# Altium PCB BLDC Gate Driver Breakout.PcbDoc
Units mil, origin at the board's own origin, x right, y up, seen from the top; angles counter-clockwise.
Board outline 6000 x 4000 mil, 2 copper layers (Top Layer, Bottom Layer); 90 components, 53 nets, 246 pads, 0 vias.
Unrouted connection lines stored in the file: 165.
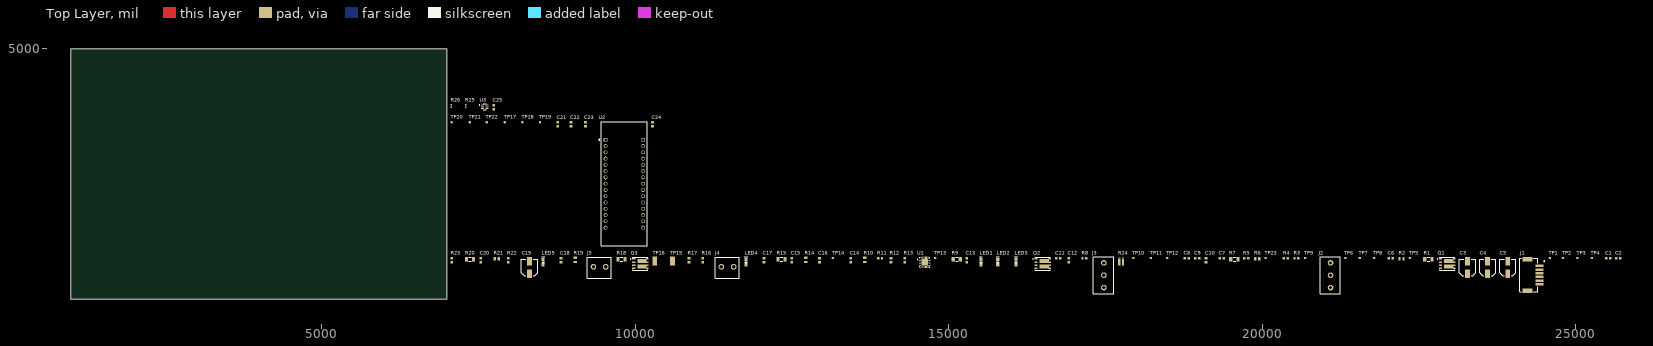
[diagram p0: Top Layer view]
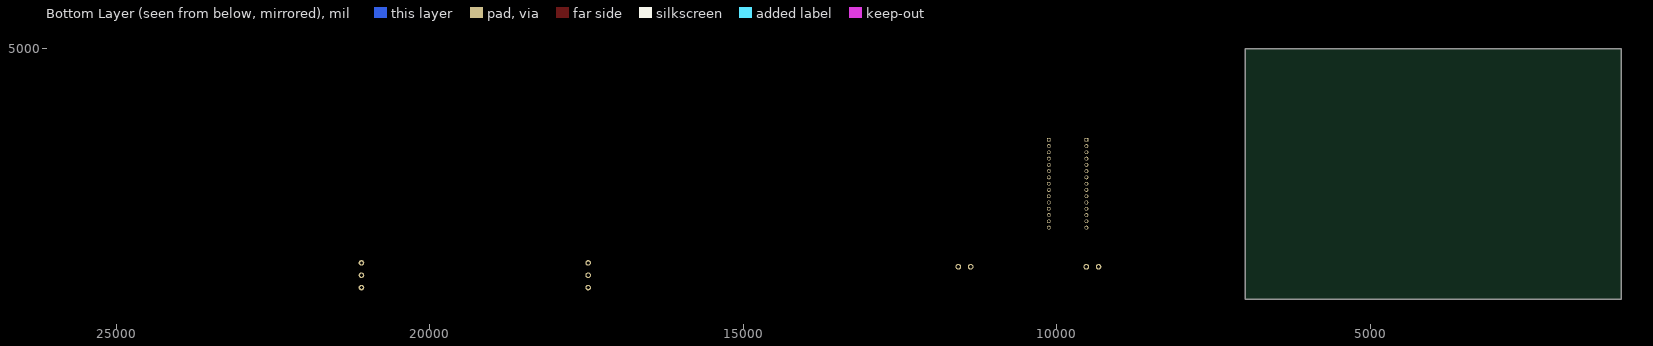
[diagram p1: Bottom Layer view, seen from below]

## Layer stack, top to bottom
Top Solder: solder mask 0.4, Solder Resist, Dk 3.5
Top Layer: signal copper 1.4
Dielectric 1: dielectric 12.6, FR-4, Dk 4.8
Bottom Layer: signal copper 1.4
Bottom Solder: solder mask 0.4, Solder Resist, Dk 3.5

## Board outline
1000,1000 7000,1000 7000,5000 1000,5000

## Design rules (kind name [scope] priority, off if disabled: settings)
Clearance [All] p1: gap=10 ignorepadtopadclearanceinfootprint=FALSE except(0: Arc-Hole Track-Hole SMDPad-Hole THPad-Hole Via-Hole Fill-Hole Poly-Hole Region-Hole Text-Hole)
PolygonConnect [All] p1: connectstyle=Relief reliefconductorwidth=10 reliefentries=4 polygonreliefangle="90 Angle" airgapwidth=10
RoomDefinition SENSE_AMP [InComponentClass('SENSE_AMP')] p1: confinementstyle=ConfineIn formatcopy=TRUE lockcomponents=FALSE outline 7045,4000 7910,4000 7910,4230 7045,4230
RoomDefinition MCU [InComponentClass('MCU')] p2: confinementstyle=ConfineIn formatcopy=TRUE lockcomponents=FALSE outline 7045,1835 10440,1835 10440,3955 7045,3955
RoomDefinition Main [InComponentClass('Main')] p3: confinementstyle=ConfineIn formatcopy=TRUE lockcomponents=FALSE outline 7045,1060 25745,1060 25745,1790 7045,1790
RoutingVias [All] p1: holewidth=28 width=50 viastyle="Through Hole" minholewidth=28 minwidth=50 maxholewidth=28 maxwidth=50
SolderMaskExpansion [All] p1: expansion=4 istentingtop=FALSE
Width [All] p1: maxlimit=10 minlimit=10 preferedwidth=10
30 further rules are at their usual default settings.

## Classes and differential pairs
component class SENSE_AMP: C25 R25 R26 U3
component class MCU: C21 C22 C23 C24 TP17 TP18 TP19 TP20 TP21 TP22 U2
component class Main: C1 C2 C3 C4 C5 C6 C7 C8 C9 C10 C11 C12 C13 C14 C15 C16 C17 C18 C19 C20 J1 J2 J3 J4 J5 LED1 LED2 LED3 LED4 LED5 Q1 Q2 Q3 R1 R2 R3 R4 R5 R6 R7 R8 R9 R10 R11 R12 R13 R14 R15 R16 R17 R18 R19 R20 R21 R22 R23 R24 TP1 TP2 TP3 TP4 TP5 TP6 TP7 TP8 TP9 TP10 TP11 TP12 TP13 TP14 TP15 TP16 TP23 U1

## Components (designator, comment, footprint, x,y, rotation, side; value= is the part's Value field where it differs from the comment)
C1 "CAP_0.1uF_50V_0603" CAP0603 25515,1655 r0 top value=0.1μF
C2 "CAP_1uF_50V_0603" CAP0603 25675,1655 r0 top value=1μF
C3 "CAP_47uF_100V_ALUM" RADIAL_CORNELL_D 23275,1510 r0 top
C4 "CAP_47uF_100V_ALUM" RADIAL_CORNELL_D 23595,1510 r0 top
C5 "CAP_47uF_100V_ALUM" RADIAL_CORNELL_D 23915,1510 r0 top
C6 "CAP_0.01uF_100V_0603" CAP0603 22050,1655 r0 top value=0.01μF
C7 "CAP_0.01uF_100V_0603" CAP0603 19355,1655 r0 top value=0.01μF
C8 "CAP_1nF_50V_0603_XR7" cap0603 18795,1655 r0 top value=1nF
C9 "CAP_1nF_50V_0603_XR7" cap0603 18965,1655 r0 top value=1nF
C10 "CAP_1nF_50V_0603_XR7" cap0603 19105,1625 r90 top value=1nF
C11 "CAP_0.1uF_50V_0603" CAP0603 16745,1655 r0 top value=0.1μF
C12 "CAP_1uF_50V_0603" CAP0603 16915,1625 r90 top value=1μF
C13 "CAP_0.1uF_50V_0603" CAP0603 15290,1625 r90 top value=0.1μF
C14 "CAP_0.01uF_100V_0603" CAP0603 13440,1625 r90 top value=0.01μF
C15 "CAP_0.01uF_100V_0603" CAP0603 12500,1625 r90 top value=0.01μF
C16 "CAP_0.1uF_50V_0603" CAP0603 12940,1625 r90 top value=0.1μF
C17 "CAP_0.1uF_50V_0603" CAP0603 12055,1625 r90 top value=0.1μF
C18 "CAP_0.01uF_100V_0603" CAP0603 8820,1625 r90 top value=0.01μF
C19 "CAP_47uF_100V_ALUM" RADIAL_CORNELL_D 8320,1510 r0 top
C20 "CAP_0.01uF_100V_0603" CAP0603 7540,1625 r90 top value=0.01μF
C21 "CAP_4.7uF_16V_0603" CAP0603 8770,3790 r90 top value=4.7μF
C22 "CAP_0.1uF_50V_0603" CAP0603 8980,3790 r90 top value=0.1μF
C23 "CAP_0.1uF_50V_0603" CAP0603 9210,3790 r90 top value=0.1μF
C24 "CAP_0.1uF_50V_0603" CAP0603 10280,3790 r90 top value=0.1μF
C25 "CAP_0.1uF_50V_0603" CAP0603 7750,4065 r90 top value=0.1μF
J1 "CON_6M_SM_RA_1.5mm" MOLEX-5025850670 24420,1535 r90 top
J2 "CON_3POS_SCREW_TERM" 1935174 21090,1385 r90 top
J3 "CON_3POS_SCREW_TERM" 1935174 17475,1385 r90 top
J4 "CON_2POS_SCREW_TERM" 1935161 11475,1520 r0 top
J5 "CON_2POS_SCREW_TERM" 1935161 9435,1520 r0 top
LED1 "LED_YELLOW" LED_0805_YELLOW 15515,1595 r90 top
LED2 "LED_YELLOW" LED_0805_YELLOW 15785,1595 r90 top
LED3 "LED_YELLOW" LED_0805_YELLOW 16075,1595 r90 top
LED4 "LED_RED" LED_0805_RED 11770,1595 r90 top
LED5 "LED_RED" LED_0805_RED 8535,1595 r90 top
Q1 "NMOS_2CH_60V_63A" "PowerPAK 8 x 8 Dual" 22950,1570 r0 top
Q2 "NMOS_2CH_60V_63A" "PowerPAK 8 x 8 Dual" 16500,1570 r0 top
Q3 "NMOS_2CH_60V_63A" "PowerPAK 8 x 8 Dual" 10085,1570 r0 top
R1 "RES_4.7Ω_1206_1%" RES1206 22650,1640 r0 top value=4.7Ω
R2 "RES_5.1Ω_0805_5%" RES0805 22220,1650 r0 top value=5.1Ω
R3 "RES_1kΩ_0603_5%" RES0603 20515,1655 r0 top value=1kΩ
R4 "RES_1kΩ_0603_5%" RES0603 20345,1655 r0 top value=1kΩ
R5 "RES_1kΩ_0603_5%" RES0603 19715,1655 r0 top value=1kΩ
R6 "RES_5.1Ω_0805_5%" RES0805 19920,1650 r0 top value=5.1Ω
R7 "RES_4.7Ω_1206_1%" RES1206 19555,1640 r0 top value=4.7Ω
R8 "RES_200kΩ_0603_5%" RES0603 17135,1655 r0 top value=200kΩ
R9 "RES_4.7Ω_1206_1%" RES1206 15130,1640 r0 top value=4.7Ω
R10 "RES_5.1Ω_0805_5%" RES0805 13665,1630 r90 top value=5.1Ω
R11 "RES_3.3kΩ_0603_1%" RES0603 13875,1655 r0 top value=3.3kΩ
R12 "RES_3.3kΩ_0603_1%" RES0603 14080,1595 r90 top value=3.3kΩ
R13 "RES_3.3kΩ_0603_1%" RES0603 14300,1595 r90 top value=3.3kΩ
R14 "RES_5.1Ω_0805_5%" RES0805 12725,1630 r90 top value=5.1Ω
R15 "RES_4.7Ω_1206_1%" RES1206 12335,1640 r0 top value=4.7Ω
R16 "RES_200kΩ_0603_5%" RES0603 11080,1595 r90 top value=200kΩ
R17 "RES_10kΩ_0603_5%" RES0603 10860,1595 r90 top value=10kΩ
R18 "RES_4.7Ω_1206_1%" RES1206 9785,1640 r0 top value=4.7Ω
R19 "RES_5.1Ω_0805_5%" RES0805 9045,1630 r90 top value=5.1Ω
R20 "RES_4.7Ω_1206_1%" RES1206 7370,1640 r0 top value=4.7Ω
R21 "RES_5.1Ω_0805_5%" RES0805 7795,1650 r0 top value=5.1Ω
R22 "RES_4.7kΩ_0603_5%" RES0603 7980,1595 r90 top value=4.7kΩ
R23 "RES_200kΩ_0603_5%" RES0603 7080,1595 r90 top value=200kΩ
R24 "RES_1mΩ_1206_1%" RESC160320X70-RL1632T4F-R001-FNH 17750,1605 r0 top value=1mΩ
R25 "RES_162kΩ_0402_1%" RES0402 7300,4085 r90 top value=162kΩ
R26 "RES_1kΩ_0402_1%" RES0402 7070,4085 r90 top value=1kΩ
TP1 "TESTPOINT_1MM_CIRCLE" TESTPOINT_CIRCLE_1MM 24585,1660 r90 top
TP2 "TESTPOINT_1MM_CIRCLE" TESTPOINT_CIRCLE_1MM 24795,1660 r90 top
TP3 "TESTPOINT_1MM_CIRCLE" TESTPOINT_CIRCLE_1MM 25025,1660 r90 top
TP4 "TESTPOINT_1MM_CIRCLE" TESTPOINT_CIRCLE_1MM 25255,1660 r90 top
TP5 "TESTPOINT_1MM_CIRCLE" TESTPOINT_CIRCLE_1MM 22355,1660 r90 top
TP6 "TESTPOINT_1MM_CIRCLE" TESTPOINT_CIRCLE_1MM 21325,1660 r90 top
TP7 "TESTPOINT_1MM_CIRCLE" TESTPOINT_CIRCLE_1MM 21555,1660 r90 top
TP8 "TESTPOINT_1MM_CIRCLE" TESTPOINT_CIRCLE_1MM 21785,1660 r90 top
TP9 "TESTPOINT_1MM_CIRCLE" TESTPOINT_CIRCLE_1MM 20685,1660 r90 top
TP10 "TESTPOINT_1MM_CIRCLE" TESTPOINT_CIRCLE_1MM 17945,1660 r90 top
TP11 "TESTPOINT_1MM_CIRCLE" TESTPOINT_CIRCLE_1MM 18225,1660 r90 top
TP12 "TESTPOINT_1MM_CIRCLE" TESTPOINT_CIRCLE_1MM 18485,1660 r90 top
TP13 "TESTPOINT_1MM_CIRCLE" TESTPOINT_CIRCLE_1MM 14785,1660 r90 top
TP14 "TESTPOINT_1MM_CIRCLE" TESTPOINT_CIRCLE_1MM 13155,1660 r90 top
TP15 "TESTPOINT_SMD_LOOP" S1751-46R 10595,1610 r90 top
TP16 "TESTPOINT_SMD_LOOP" S1751-46R 10315,1610 r90 top
TP17 "TESTPOINT_1MM_CIRCLE" TESTPOINT_CIRCLE_1MM 7925,3825 r90 top
TP18 "TESTPOINT_1MM_CIRCLE" TESTPOINT_CIRCLE_1MM 8205,3825 r90 top
TP19 "TESTPOINT_1MM_CIRCLE" TESTPOINT_CIRCLE_1MM 8485,3825 r90 top
TP20 "TESTPOINT_1MM_CIRCLE" TESTPOINT_CIRCLE_1MM 7075,3825 r90 top
TP21 "TESTPOINT_1MM_CIRCLE" TESTPOINT_CIRCLE_1MM 7365,3825 r90 top
TP22 "TESTPOINT_1MM_CIRCLE" TESTPOINT_CIRCLE_1MM 7635,3825 r90 top
TP23 "TESTPOINT_1MM_CIRCLE" TESTPOINT_CIRCLE_1MM 20055,1660 r90 top
U1 "DRV8300DRGER" RGE0024B-IPC_B 14620,1590 r0 top
U2 "STM32F042K6 NUCLEO" NUCLEO-F042K6 9830,2845 r0 top
U3 "LMV601MG/NOPB" SOT65P210X110-6N 7605,4070 r0 top

## Footprints (in the part's own frame and the unit in brackets; to place one, negate y for a bottom-side part, rotate by r counter-clockwise, add the part's x,y. Pads: shape width x height; smd on the part's side, far side on the other; paste and mask are expansions set on the pad)
1935161 [mm] "TERM BLK 2POS SIDE ENTRY 5MM PCB"
  round 2.3 hole 1.325: 1(-2.5,0) 2(2.5,0)
  silkscreen extent -5.01,-4.57 4.83,3.94, body extent -5.01,-5.06 5.39,3.94, height 11.41
1935174 [mm] "5 MM PITCH"
  round 2.3 hole 1.325: 1(-5,0) 2(0,0) 3(5,0)
  silkscreen extent -7.5,-4 7.48,4.2, body extent -8.08,-4 7.48,5, height 11.41
CAP0603 [mm]
  rrect20% 1x1.1 smd: 1(-0.8,0) 2(0.8,0)
  body extent -0.87,-0.48 0.88,0.48, height 0.87
cap0603 [mm]
  rrect20% 1x1.1 smd: 1(-0.8,0) 2(0.8,0)
  body extent -0.87,-0.48 0.88,0.48, height 0.87
LED_0805_RED [mm] "SMD, 2-Leads, Body 2x1.25mm"
  rrect20% 1.3x1.3 smd: 1(-1.05,0) 2(1.05,0)
  silkscreen extent -0.18,-0.63 2.11,0.64, body extent -1,-0.62 1,0.63, height 1.12
LED_0805_YELLOW [mm] "SMD, 2-Leads, Body 2x1.25mm"
  rrect20% 1.3x1.3 smd: 1(-1.05,0) 2(1.05,0)
  silkscreen extent -0.18,-0.63 2.11,0.64, body extent -1,-0.62 1,0.63, height 1.12
MOLEX-5025850670 [mm]
  rrect15% 1.9x4 smd: 0(-10.125,4.82) 0(2.675,4.82)
  rrect15% 1x3.1 smd: 1(0,0) 2(-1.5,0) 3(-3,0) 4(-4.5,0) 5(-6,0) 6(-7.5,0)
  silkscreen extent -10.4,-2.1 3.1,8, body extent -10.25,-0.62 3.05,7.88, height 6.41
NUCLEO-F042K6 [mm]
  rect 1.53x1.53 hole 1.02: 1(-7.62,17.78) 16(7.62,17.78)
  round 1.53 hole 1.02: 2(-7.62,15.24) 3(-7.62,12.7) 4(-7.62,10.16) 5(-7.62,7.62) 6(-7.62,5.08) 7(-7.62,2.54) 8(-7.62,0) 9(-7.62,-2.54) 10(-7.62,-5.08) 11(-7.62,-7.62) 12(-7.62,-10.16) 13(-7.62,-12.7) 14(-7.62,-15.24) 15(-7.62,-17.78) 17(7.62,15.24) 18(7.62,12.7) 19(7.62,10.16) 20(7.62,7.62) 21(7.62,5.08) 22(7.62,2.54) 23(7.62,0) 24(7.62,-2.54) 25(7.62,-5.08) 26(7.62,-7.62) 27(7.62,-10.16) 28(7.62,-12.7) 29(7.62,-15.24) 30(7.62,-17.78)
  silkscreen extent -10.36,-25.14 9.27,25.14
"PowerPAK 8 x 8 Dual" [mm]
  rect 1.27x0.61 smd: 1(-2.67,1.905) 2(-2.67,0.635) 3(-2.67,-0.635) 4(-2.67,-1.905)
  rect 3.81x1.65 smd: 5(0.69,1.13) 6(0.69,-1.13)
  rect 1.02x0.61 smd: 5(2.795,0.635) 5(2.795,1.905) 6(2.795,-1.905) 6(2.795,-0.635)
  silkscreen extent -4.01,-2.58 3.08,2.58, body extent -3.2,-2.58 2.95,2.58, height 1.12
RADIAL_CORNELL_D [mm] "Size D radial surface mount capacitor"
  rrect15% 2x3.5 smd: 1(0,-2.5) 2(0,2.5)
  silkscreen extent -3.3,-3.3 3.3,3.3, body extent -3.3,-3.62 3.3,3.67, height 5.9
RES0402 [mm] "Chip Resistor, Body 1x0.5mm, IPC Medium Density"
  rrect15% 0.6x0.7 smd: 1(-0.5,0) 2(0.5,0)
  body extent -0.5,-0.25 0.5,0.25, height 0.27
RES0603 [mm] "Chip Resistor, Body 1.6x0.8mm, IPC Medium Density"
  rrect15% 1x1.1 smd: 1(0,0) 2(1.6,0)
  body extent 0,-0.4 1.6,0.4, height 0.46
RES0805 [mm] "Chip Resistor, 2-Leads, Body 2.00x1.25mm, IPC High Density"
  rrect15% 0.9x1.4 smd: 1(-0.825,0) 2(0.825,0)
  body extent -1,-0.62 1,0.63, height 0.61
RES1206 [mm] "Chip Resistor, Body 3.2x1.6mm, IPC Medium Density"
  rrect20% 1.3x2 smd: 1(-1.45,0) 2(1.45,0)
  silkscreen extent -0.5,-0.8 0.5,0.8, body extent -1.6,-0.8 1.6,0.8, height 0.61
RESC160320X70-RL1632T4F-R001-FNH [mm]
  rect 0.94x2.65 smd: 1(-0.74,-0.275) 2(0.74,-0.275)
  rect 0.94x0.35 smd: 3(-0.74,1.425) 4(0.74,1.425)
RGE0024B-IPC_B [mm]
  rect 0.91x0.242 smd paste+0 mask+0: 1(-1.901,1.25) 2(-1.901,0.75) 3(-1.901,0.25) 4(-1.901,-0.25) 5(-1.901,-0.75) 6(-1.901,-1.25) 13(1.901,-1.25) 14(1.901,-0.75) 15(1.901,-0.25) 16(1.901,0.25) 17(1.901,0.75) 18(1.901,1.25)
  rect 0.242x0.91 smd paste+0 mask+0: 7(-1.25,-1.901) 8(-0.75,-1.901) 9(-0.25,-1.901) 10(0.25,-1.901) 11(0.75,-1.901) 12(1.25,-1.901) 19(1.25,1.901) 20(0.75,1.901) 21(0.25,1.901) 22(-0.25,1.901) 23(-0.75,1.901) 24(-1.25,1.901)
  rect 2.55x2.55 smd paste-1.262 mask+0: 25(0,0)
  silkscreen extent -3.08,-2 2,2, body extent 0,0 0.25,0.25, height 0.25
S1751-46R [mm] "SMD LOOP TESTPOINT"
  rrect15% 3.6x2 smd: 1(0,0)
  body extent -1.63,-0.85 1.62,0.8, height 2.01
SOT65P210X110-6N [mm]
  rrect25% 1.19x0.4 smd: 1(-0.96,0.65) 2(-0.96,0) 3(-0.96,-0.65) 4(0.96,-0.65) 5(0.96,0) 6(0.96,0.65)
  silkscreen extent -2.2,-1.17 0.63,1.17
TESTPOINT_CIRCLE_1MM [mm]
  round 1 smd: 1(0,0)

## Part data
C1 C11 C13 C16 C17 C22 C23 C24 C25: "CAP CER 0.1UF 50V X7R 0603", Dielectric=X7R, Manufacturer 1=Yageo, Manufacturer Part Number 1=CC0603KRX7R9BB104, Package/Footprint=0603, Supplier Part Number 1=311-1344-1-ND, Voltage Rating=50V, Mounting Type=SMD, Supplier 1=Digi-Key
C2 C12: "CAP CER 1UF 50V X6S 0603", Dielectric=X6S, Manufacturer 1="TDK Corporation", Manufacturer Part Number 1=C1608X6S1H105K080AC, Supplier Part Number 1=445-7424-1-ND, Voltage Rating=50V, Supplier 1=Digi-Key
C3 C4 C5 C19: "Aluminum Electrolytic Capacitor, Polarized, Aluminum (wet), 100V, 20% +Tol, 20% -Tol, 47uF, Surface Mount, 5454", Capacitance=47uF, Capacitor Type=Aluminium, Leakage Current=47uA, Manufacturer=Nichicon, Manufacturer Part Number=UCD2A470MNQ1MS, Max Operating Temperature=105°C, Min Operating Temperature=-55°C, Negative Tolerance=20%, Package Shape=Cylindrical, Package Style=SMTMeter, Rated DC Voltage (URdc)=100V, Ripple Current=250mA, Supplier Part Number 1=493-6201-1-ND, Category="Aluminum Electrolytic Capacitors", ComponentLink1Description=https://datasheet.ciiva.com:443/pdfs/VipMasterIC/IC/NICH/NICH-S-A0003527725/NICH-S-A0003527725-1.pdf?src-supplier=IHS+Markit, ComponentLink1URL=https://datasheet.ciiva.com:443/pdfs/VipMasterIC/IC/NICH/NICH-S-A0003527725/NICH-S-A0003527725-1.pdf?src-supplier=IHS+Markit, ComponentLink2Description=https://datasheet.ciiva.com/11776/0900766b80ebdadd-11776792.pdf?src-supplier=RSComponents, ComponentLink2URL=https://datasheet.ciiva.com/11776/0900766b80ebdadd-11776792.pdf?src-supplier=RSComponents, ComponentLink3Description=https://datasheet.ciiva.com/30526/getdatasheetpartid-513218-30526979.pdf?src-supplier=Verical, ComponentLink3URL=https://datasheet.ciiva.com/30526/getdatasheetpartid-513218-30526979.pdf?src-supplier=Verical, ComponentLink4Description=https://datasheet.ciiva.com/16389/e-cd-16389182.pdf?src-supplier=Future+Electronics, ComponentLink4URL=https://datasheet.ciiva.com/16389/e-cd-16389182.pdf?src-supplier=Future+Electronics, ComponentLink5Description=https://datasheet.ciiva.com/17523/e-cd-17523974.pdf?src-supplier=Avnet+Europe, ComponentLink5URL=https://datasheet.ciiva.com/17523/e-cd-17523974.pdf?src-supplier=Avnet+Europe, ComponentLink6Description=https://datasheet.ciiva.com/6326/e-cd-6326630.pdf?src-supplier=Digi-Key, ComponentLink6URL=https://datasheet.ciiva.com/6326/e-cd-6326630.pdf?src-supplier=Digi-Key, ComponentLink7Description=https://datasheet.ciiva.com/6326/e-cd-6326632.pdf?src-supplier=Digi-Key, ComponentLink7URL=https://datasheet.ciiva.com/6326/e-cd-6326632.pdf?src-supplier=Digi-Key, ComponentLink8Description=https://datasheet.ciiva.com/6326/e-cd-6326634.pdf?src-supplier=Digi-Key, ComponentLink8URL=https://datasheet.ciiva.com/6326/e-cd-6326634.pdf?src-supplier=Digi-Key, Dielectric Material=Aluminium, Height=13.5mm, JESD-609 Code=e3, Length=14.6mm, Mount="Surface Mount", Number of Pins=2, Packaging="Tape and Reel", Polarity=Polarized, Positive Tolerance=20%, Pricing 1="1=2.15000, 10=1.69800, 50=1.47140, 100=1.27330 (USD)", REACH SVHC=Yes, RoHS=Yes, RoHS Compliant=Yes, Size Code=7575, Stock 1=515, Supplier 1=Digi-Key, Tan Delta=0.07, Terminal Finish=Copper, Termination=Flat, Voltage Rating=100V, Width=13.6mm
C6 C7 C14 C15 C18 C20: "CAP CER 0.01uF 100V X7R 0603", Dielectric=X7R, Manufacturer 1="Murata Electronics", Manufacturer Part Number 1=GCM188R72A103KA37J, Supplier Part Number 1=490-8028-1-ND, Voltage Rating=100V, Supplier 1=Digi-Key
C8 C9 C10: "CAP CER 1NF 50V X7R 0603", Dielectric=X7R, Manufacturer="KYOCERA AVX", Manufacturer Part Number=06035C102KAT2A, Package=0603, Supplier Part Number 1=478-1215-2-ND, Voltage Rating=50V, Supplier 1=Digi-Key
C21: "CAP CER 4.7UF 16V X6S 0603", Dielectric=X6S, Manufacturer 1="Murata Electronics", Manufacturer Part Number 1=GRM188C81C475KE11D, Package=0603, Supplier Part Number 1=490-13362-1-ND, Voltage Rating=16V, Mounting Type=SMD, Supplier 1=Digi-Key
J1: "CONN HEADER SMD RIGHT ANGLE 1.5 MM PITCH", Manufacturer 1=Molex, Manufacturer Part Number 1=5025850670, Package/Footprint=SMD, Supplier Part Number 1=WM12832CT-ND, Family=CLIK-Mate, Mounting Type=SMD, Supplier 1=Digi-Key
J2 J3: "TERM BLK 3POS SIDE ENTRY 5MM", Current Rating=17.5A, Manufacturer 1="Phoenix Contact", Manufacturer Part Number 1=1935174, Package/Footprint=TH, Supplier Part Number 1=277-1578-ND, Voltage Rating=250V, Mounting Type=TH, Orientation=Straight, Pitch=5mm, Supplier 1=Digi-Key
J4 J5: "TERM BLK 2POS SIDE ENTRY 5MM", Manufacturer 1="Phoenix Contact", Manufacturer Part Number 1=1935161, Package/Footprint=SMD, Supplier Part Number 1=277-1667-ND, Mounting Type=TH, Supplier 1=Digi-Key
LED1 LED2 LED3: "LED YELLOW DIFFUSED 0805 SMD", Forward Voltage Drop=2.2V, Manufacturer 1=OSRAM, Manufacturer Part Number 1="LY R976-PS-36", Package="0805 (2012 Metric)", Supplier Part Number 1=475-2560-1-ND, Supplier 1=Digi-Key
LED4 LED5: "LED RED DIFFUSED 0805 SMD", Forward Voltage Drop=2V, Manufacturer 1=OSRAM, Manufacturer Part Number 1="LS R976-NR-1", Package/Footprint=0805, Supplier Part Number 1=475-1278-1-ND, Mounting Type=SMD, Supplier 1=Digi-Key
Q1 Q2 Q3: "MOSFET 2 N-CH 60V POWERPAK8X8", Manufacturer=Vishay, Manufacturer Part Number=SQJQ960EL-T1_GE3, Supplier Part Number 1=SQJQ960EL-T1_GE3CT-ND, Category=MOSFETs, ComponentLink1Description=http://www.vishay.com/docs/76020/sqjq960el.pdf?src-supplier=Digi-Key, ComponentLink1URL=http://www.vishay.com/docs/76020/sqjq960el.pdf?src-supplier=Digi-Key, Pricing 1="1=2.32000, 10=2.08400, 100=1.67520, 500=1.37638, 1000=1.17975 (USD)", RoHS=No, Stock 1=848, Supplier 1=Digi-Key
R1 R7 R9 R15 R18 R20: "RES 4.7 OHM 1% 1/2W 1206", Manufacturer 1="Stackpole Electronics Inc", Manufacturer Part Number 1=RNCP1206FTD4R70, Package/Footprint=1206, Supplier Part Number 1=RNCP1206FTD4R70CT-ND, Mounting Type=SMD, Supplier 1=Digi-Key
R2 R6 R10 R14 R19 R21: "RES 5.1 OHM 5% 1/8W 0805", Manufacturer 1=Panasonic, Manufacturer Part Number 1=ERJ-6GEYJ5R1V, Supplier Part Number 1=P5.1ACT-ND, Supplier 1=Digi-Key
R3 R4 R5: "RES 1K OHM 5% 1/10W 0603", Manufacturer 1=Yageo, Manufacturer Part Number 1=RC0603JR-071KL, Package=0603, Supplier Part Number 1=311-1.0KGRCT-ND, Mounting Type=SMD, Supplier 1=Digi-Key
R8 R16 R23: "RES 200K OHM 5% 1/10W 0603", Manufacturer 1="Panasonic Electronic Components", Manufacturer Part Number 1=ERJ-3GEYJ204V, Package/Footprint=0603, Supplier Part Number 1=P200KGCT-ND, Mounting Type=SMD, Supplier 1=Digi-Key
R11 R12 R13: "RES 3.3K OHM 1% 1/10W 0603", Manufacturer 1=Yageo, Manufacturer Part Number 1=RT0603FRE073K3L, Package=0603, Supplier Part Number 1=YAG3354CT-ND, Mounting Type=SMD, Supplier 1=Digi-Key
R17: "RES 10K OHM 5% 1/10W 0603", Manufacturer 1=Yageo, Manufacturer Part Number 1=RC0603JR-0710KL, Package=0603, Supplier Part Number 1=311-10KGRCT-ND, Mounting Type=SMD, Supplier 1=Digi-Key
R22: "RES 4.7K OHM 5% 1/10W 0603", Manufacturer 1=Yageo, Manufacturer Part Number 1=RC0603JR-074K7L, Supplier Part Number 1=311-4.7KGRCT-ND, Supplier 1=Digi-Key
R24: "RES 0.001 OHM 1% 1W 1206", Manufacturer 1="Delta Electronics/Cyntec", Manufacturer Part Number 1=RL1632T4F-R001-FNH, Package/Footprint=1206, Supplier Part Number 1=2037-RL1632T4F-R001-FNHCT-ND, Mounting Type=SMD, Supplier 1=Digi-Key
R25: "RES 162K OHM 1% 1/16W 0402", Manufacturer 1="Panasonic Electronic Components", Manufacturer Part Number 1=RMCF0402FT162K, Package/Footprint=0402, Power="0.063W, 1/16W", Supplier Part Number 1=RMCF0402FT162KCT-ND, Tolerance=1%, Mounting Type=SMD, Supplier 1=Digi-Key
R26: "RES 1K OHM 1% 1/16W 0402", Manufacturer 1="Stackpole Electronics", Manufacturer Part Number 1=RMCF0402FT1K00, Package=0402, Supplier Part Number 1=RMCF0402FT1K00CT-ND, Tolerance=1%, Supplier 1=Digi-Key
TP1 TP2 TP3 TP4 TP5 TP6 TP7 TP8 TP9 TP10 TP11 TP12 TP13 TP14 TP17 TP18 TP19 TP20 TP21 TP22 TP23: "TESTPOINT 1MM CIRCLE"
TP15 TP16: "TESTPOINT SMD LOOP", Manufacturer 1=Harwin, Manufacturer Part Number 1=S1751-46R, Package/Footprint=SMD, Supplier Part Number 1=952-1478-1-ND, Mounting Type=SMD, Supplier 1=Digi-Key
U1: "High-Side and Low-Side Gate Driver IC Non-Inverting 24-VQFN (4x4)", Mfr_Name="Texas Instruments", Supplier Part Number 1=296-DRV8300DRGERCT-ND, Copyright="Copyright (C) 2022 Ultra Librarian. All rights reserved.", Manufacturer_Part_Number=DRV8300DRGER, RefDes=RefDes, Supplier 1=Digi-Key, Type=DEV
U2: library part STM32F042K6-NUCLEO, "STM32 Nucleo-32 development board with STM32F042K6 MCU, supports Arduino connectivity", Manufacturer=STMicroelectronics, Manufacturer Part Number=NUCLEO-F042K6, Supplier Part Number 1=497-15980-ND, Category="Embedded Processors and Controllers", ComponentLink1Description=http://www.farnell.com/datasheets/1966773.pdf?src-supplier=Farnell, ComponentLink1URL=http://www.farnell.com/datasheets/1966773.pdf?src-supplier=Farnell, ComponentLink2Description=http://www.st.com/content/ccc/resource/technical/document/data_brief/b1/d8/13/d4/b0/b7/4b/6e/DM00214578.pdf/files/DM00214578.pdf/jcr:content/translations/en.DM00214578.pdf?src-supplier=Digi-Key, ComponentLink2URL=http://www.st.com/content/ccc/resource/technical/document/data_brief/b1/d8/13/d4/b0/b7/4b/6e/DM00214578.pdf/files/DM00214578.pdf/jcr:content/translations/en.DM00214578.pdf?src-supplier=Digi-Key, ComponentLink3Description=http://www.st.com/st-web-ui/static/active/en/resource/technical/document/user_manual/DM00119724.pdf?s_searchtype=keyword&src-supplier=Avnet, ComponentLink3URL=http://www.st.com/st-web-ui/static/active/en/resource/technical/document/user_manual/DM00119724.pdf?s_searchtype=keyword&src-supplier=Avnet, ComponentLink4Description=http://www.farnell.com/datasheets/1966773.pdf?src-supplier=Element14, ComponentLink4URL=http://www.farnell.com/datasheets/1966773.pdf?src-supplier=Element14, ComponentLink5Description=http://www.st.com/st-web-ui/static/active/en/resource/technical/document/user_manual/DM00119724.pdf?s_searchtype=keyword&src-supplier=Avnet+Asia, ComponentLink5URL=http://www.st.com/st-web-ui/static/active/en/resource/technical/document/user_manual/DM00119724.pdf?s_searchtype=keyword&src-supplier=Avnet+Asia, Pricing 1="1=10.99000 (USD)", RoHS=Yes, Stock 1=10, Supplier 1=Digi-Key
U3: library part IC_OPAMP_GP, "IC OPAMP GP 1 CIRCUIT SC70-6", Manufacturer="Texas Instruments", Ratings="2.7-5.5V, -25-125degC, 1MHz", Manufacturer Part Number=LMV601MG/NOPB

## Nets (pads, with @x,y where several pads share a name; then routed paths per layer and width w, separated by ;. In a path a pad name is that pad's centre, name@x,y a point inside that pad or via, vN(x,y) a via of type N, cw(c..) or ccw(c..) an arc to the next point about the centre after c; other vN are vias at no path point)
3V3: C24.2 C25.2 U2.28 U2.29 U3.5 U3.6
5V0: C1.2 C2.2 J1.1 U2.19
12V: C11.2 C12.2 C19.1 C21.2 C22.2 C23.2 J5.1 LED5.1 U1.4 U2.16
GHA: R2.1 U1.19
GHB: R10.1 U1.16
GHC: R19.1 U1.13
GLA: R6.1 U1.11
GLB: R14.1 U1.10
GLC: R21.1 U1.9
GND: C1.1 C2.1 C3.2 C4.2 C5.2 C7.1 C8.1 C9.1 C10.1 C11.1 C12.1 C15.1 C19.2 C20.1 C21.1 C22.1 C23.1 C24.1 C25.1 J1.0 J1.6 J4.2 J5.2 Q2.3 Q3.3 R8.2 R11.1 R12.1 R13.1 R16.2 R17.1 R22.1 R23.2 R24.1 R26.1 TP15.1 TP16.1 U1.6 U1.25 U2.4 U2.17 U3.2
NetC6_2: C6.2 R1.2
NetC7_2: C7.2 R7.2
NetC8_2: C8.2 R5.1 TP6.1 U2.25
NetC9_2: C9.2 R4.1 TP7.1 U2.20
NetC10_2: C10.2 R3.1 TP8.1 U2.26
NetC13_1: C13.1 U1.20
NetC14_2: C14.2 R9.2
NetC15_2: C15.2 R15.2
NetC16_1: C16.1 U1.17
NetC17_1: C17.1 U1.14
NetC18_2: C18.2 R18.2
NetC20_2: C20.2 R20.2
NetJ1_2: J1.2 TP4.1 U2.23
NetJ1_3: J1.3 TP3.1 U2.22
NetJ1_4: J1.4 TP2.1 U2.21
NetJ1_5: J1.5 TP1.1 U2.12
NetJ2_1: J2.1 R3.2
NetJ2_2: J2.2 R4.2
NetJ2_3: J2.3 R5.2
NetLED1_2: LED1.2 R11.2
NetLED2_2: LED2.2 R12.2
NetLED3_2: LED3.2 R13.2
NetLED4_2: LED4.2 R17.2
NetLED5_2: LED5.2 R22.2
NetQ1_1: Q1.1 R2.2 TP5.1
NetQ1_3: Q1.3 R24.2 TP23.1 U3.1
NetQ1_4: Q1.4 R6.2 R8.1 TP9.1
NetQ2_1: Q2.1 R10.2 TP13.1
NetQ2_4: Q2.4 R14.2 R16.1 TP14.1
NetQ3_1: Q3.1 R19.2
NetQ3_4: Q3.4 R21.2 R23.1
NetR25_1: R25.1 R26.2 U3.3
NetR25_2: R25.2 U2.27 U3.4
NetTP17_1: TP17.1 U1.24 U2.13
NetTP18_1: TP18.1 U1.23 U2.2
NetTP19_1: TP19.1 U1.22 U2.1
NetTP20_1: TP20.1 U1.1 U2.7
NetTP21_1: TP21.1 U1.2 U2.8
NetTP22_1: TP22.1 U1.3 U2.14
"PHASE A": C6.1 C13.2 J3.1 LED1.1 Q1.2 Q1.6 R7.1 TP10.1 U1.18
"PHASE B": C14.1 C16.2 J3.2 LED2.1 Q2.2 Q2.6 R15.1 TP11.1 U1.15
"PHASE C": C17.2 C18.1 J3.3 LED3.1 Q3.2 Q3.6 R20.1 TP12.1 U1.12
VBUS: C3.1 C4.1 C5.1 J4.1 LED4.1 Q1.5 Q2.5 Q3.5 R1.1 R9.1 R18.1
pads on no net: R24.3 R24.4 U1.5 U1.7 U1.8 U1.21 U2.3 U2.5 U2.6 U2.9 U2.10 U2.11 U2.15 U2.18 U2.24 U2.30